# Altium PCB STM32.PcbDoc (part 3 of 6)
Units mm, origin at the board's own origin, x right, y up, seen from the top; angles counter-clockwise.
Board outline 99.69 x 99.7 mm, 2 copper layers (Top Layer, Bottom Layer); 150 components, 142 nets, 668 pads, 273 vias.
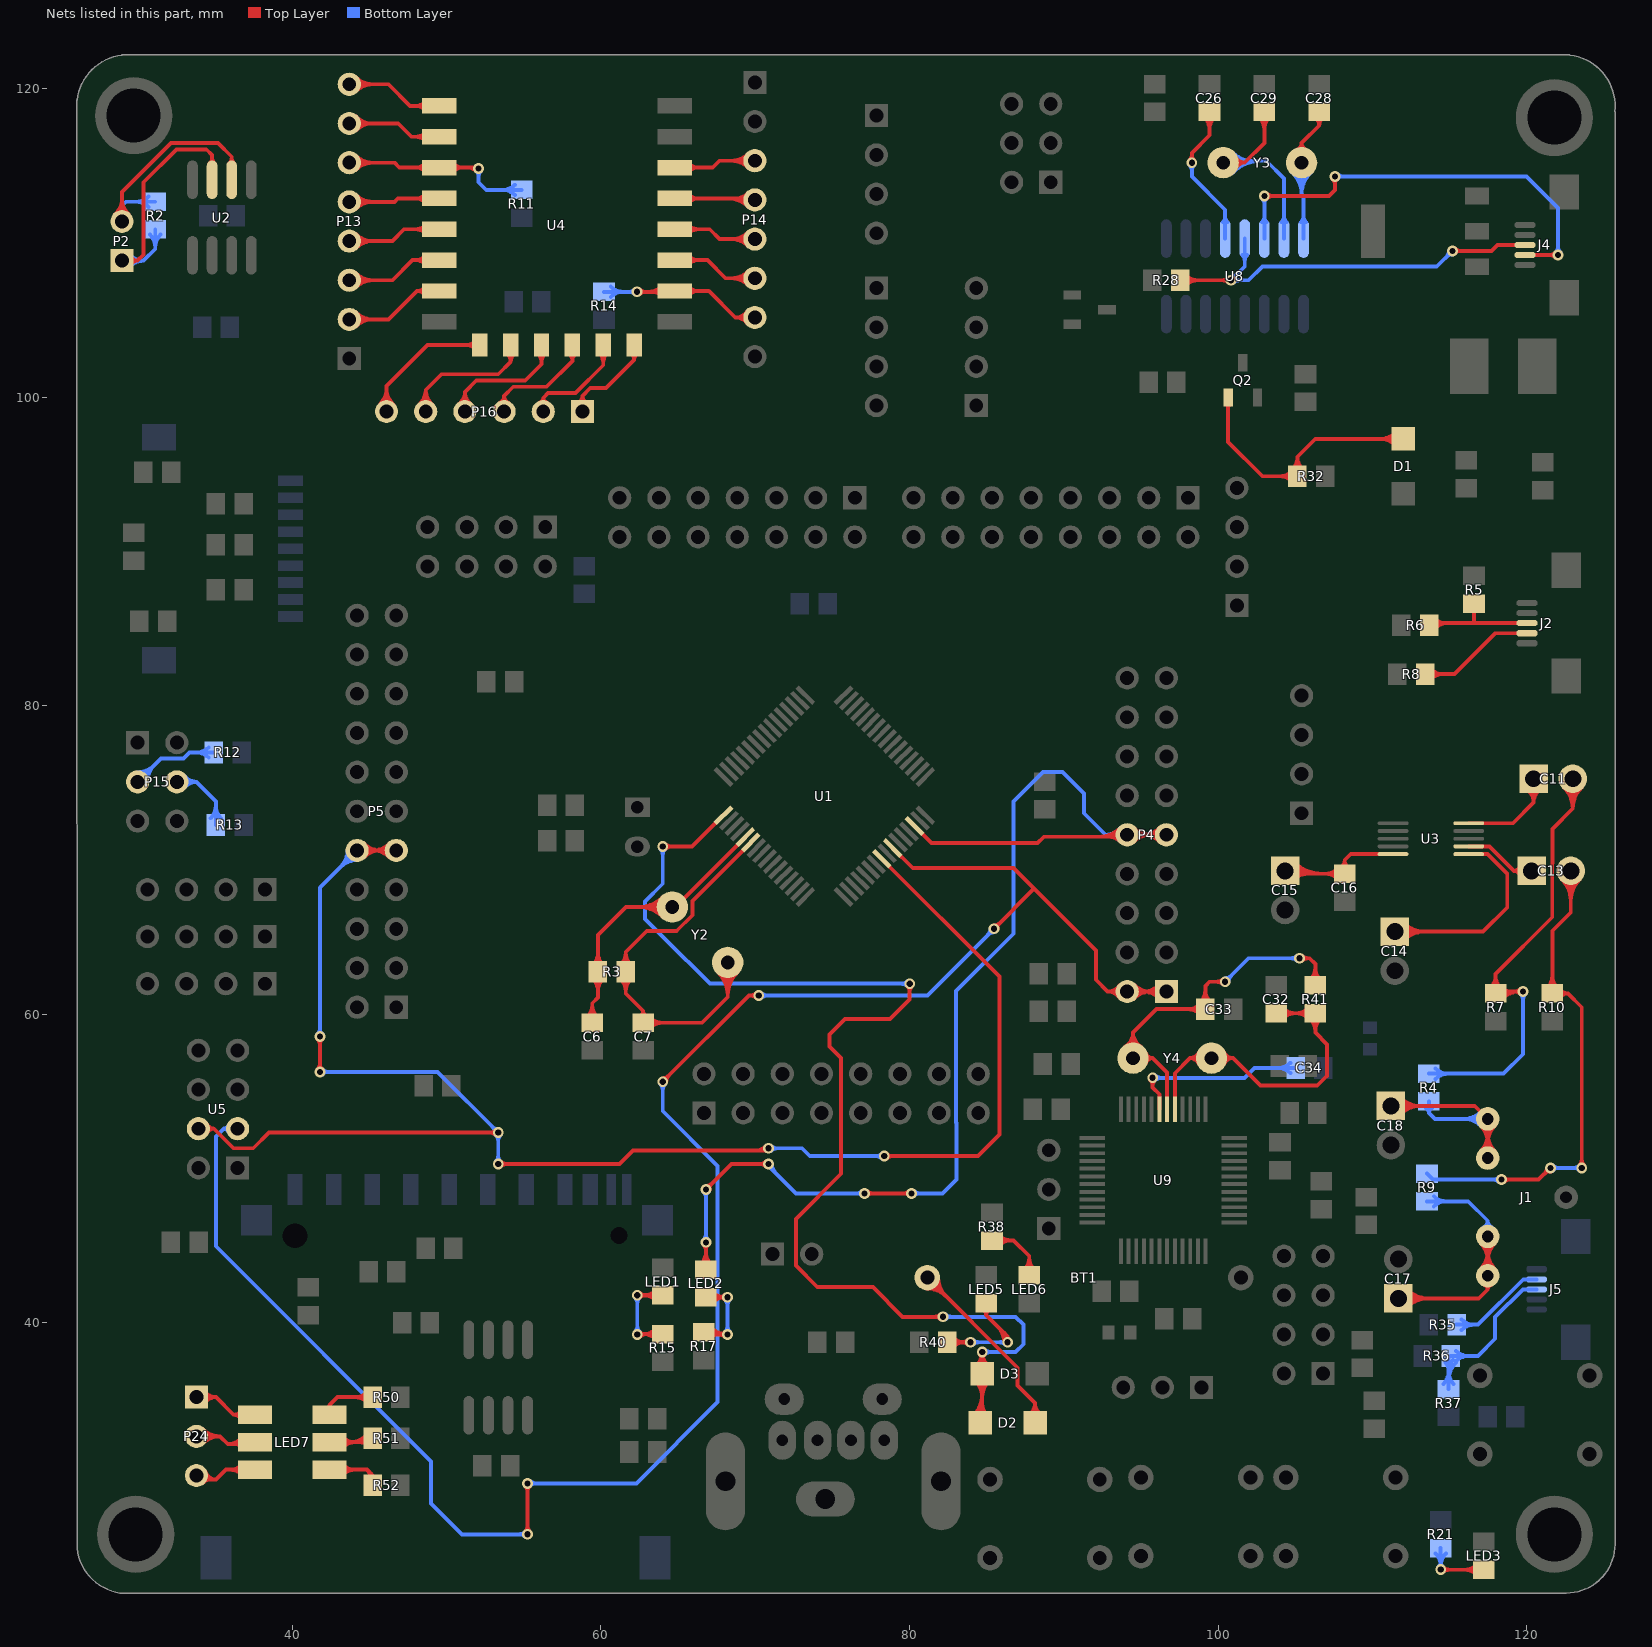
[diagram p3: the nets of this part, all layers, seen from the top]

## Via types
v1: diameter 0.7, hole 0.4, Top Layer to Bottom Layer, 272 vias
v2: diameter 1.27, hole 0.711, Top Layer to Bottom Layer, 1 vias

## Nets (pads, with @x,y where several pads share a name; then routed paths per layer and width w, separated by ;. In a path a pad name is that pad's centre, name@x,y a point inside that pad or via, vN(x,y) a via of type N, cw(c..) or ccw(c..) an arc to the next point about the centre after c; other vN are vias at no path point) (continued)
LED2: LED2.2 P4.9 P4.10 U1.30 | length 101.7
  Top Layer w0.25: LED2.2@66.466,43.781 ccw(c65.655,44.592) 66.802,44.592 ccw(c67.949,44.592) LED2.2@67.138,43.781 ; v1@66.643,45.053 cw(c66.259,44.669) 66.802,44.669 cw(c67.345,44.669) v1@66.961,45.053 ; LED2.2@66.802,43.445 v1(66.802,45.212) ; v1(66.802,48.641) 68.453,50.292 v1(70.866,50.292) ; v1@66.802,48.866 ccw(c66.802,49.409) 67.186,49.025 ccw(c67.57,48.641) v1@67.027,48.641 ; v1@70.707,50.133 ccw(c70.323,49.749) 70.323,50.292 ccw(c70.323,50.835) v1@70.707,50.451 ; v1(77.089,48.387) v1(80.137,48.387) ; v1@77.248,48.228 cw(c77.632,47.844) 77.632,48.387 cw(c77.632,48.93) v1@77.248,48.546 ; v1@79.978,48.228 ccw(c79.594,47.844) 79.594,48.387 ccw(c79.594,48.93) v1@79.978,48.546 ; P4.10@94.107,71.628 P4.9@96.647,71.628 ; P4.10@94.372,71.363 cw(c95.012,70.723) 95.012,71.628 cw(c95.012,72.533) P4.10@94.372,71.893 ; P4.10@94.549,71.186 cw(c95.616,70.119) 95.616,71.628 cw(c95.616,73.137) P4.10@94.549,72.07 ; P4.9@96.205,71.186 ccw(c95.138,70.119) 95.138,71.628 ccw(c95.138,73.137) P4.9@96.205,72.07 ; P4.9@96.382,71.363 ccw(c95.742,70.723) 95.742,71.628 ccw(c95.742,72.533) P4.9@96.382,71.893
  Top Layer w0.254: U1.30@80.319,72.191 81.414,71.097 88.306,71.097 88.71,71.501 93.98,71.501 P4.10@94.107,71.628 ; 92.296,71.501 ccw(c92.296,73.439) P4.10@93.666,72.069 ; P4.10@93.666,71.187 ccw(c92.91,70.431) 92.91,71.501 ccw(c92.91,72.825) P4.10@93.846,71.889
  Bottom Layer w0.25: v1@66.643,45.371 ccw(c66.259,45.755) 66.802,45.755 ccw(c67.345,45.755) v1@66.961,45.371 ; v1@66.643,48.482 cw(c66.259,48.098) 66.802,48.098 cw(c67.345,48.098) v1@66.961,48.482 ; v1(66.802,45.212) v1(66.802,48.641) ; v1(70.866,50.292) 70.739,50.292 72.644,48.387 v1(77.089,48.387) ; v1@71.091,50.292 ccw(c71.941,50.292) 71.34,49.691 ; v1@76.93,48.228 ccw(c76.546,47.844) 76.546,48.387 ccw(c76.546,48.93) v1@76.93,48.546 ; v1(80.137,48.387) 82.146,48.387 83.035,49.276 83.035,52.96 83.021,52.973 83.021,61.495 86.741,65.215 86.741,73.787 88.646,75.692 89.916,75.692 91.313,74.295 91.313,73.025 92.71,71.628 ; v1@80.296,48.228 cw(c80.68,47.844) 80.68,48.387 cw(c80.68,48.93) v1@80.296,48.546 ; P4.10@93.641,71.211 ccw(c92.71,70.379) 92.71,71.628 ; P4.10@93.641,72.045 cw(c92.71,72.877) 92.71,71.628 ; P4.10@93.827,71.378 ccw(c93.269,70.879) 93.269,71.628 ccw(c93.269,72.377) P4.10@93.827,71.878 ; P4.10@94.107,71.628 92.71,71.628
NCE: P4.1 P4.2 U1.26 U5.3 | length 150
  Top Layer w0.25: P4.2@94.107,61.468 P4.1@96.647,61.468 ; P4.2@94.372,61.203 cw(c95.012,60.563) 95.012,61.468 cw(c95.012,62.373) P4.2@94.372,61.733 ; P4.2@94.549,61.026 cw(c95.616,59.959) 95.616,61.468 cw(c95.616,62.977) P4.2@94.549,61.91 ; P4.1@96.205,61.026 ccw(c95.138,59.959) 95.138,61.468 ccw(c95.138,62.977) P4.1@96.205,61.91 ; P4.1@96.382,61.203 ccw(c95.742,60.563) 95.742,61.468 ccw(c95.742,62.373) P4.1@96.382,61.733
  Top Layer w0.254: v1@55.087,26.447 ccw(c54.707,26.827) 55.245,26.827 ccw(c55.783,26.827) v1@55.403,26.447 ; v1@55.087,29.433 cw(c54.707,29.053) 55.245,29.053 cw(c55.783,29.053) v1@55.403,29.433 ; v1(55.245,26.289) v1(55.245,29.591) ; v1(64.008,55.626) 69.596,61.214 v1(70.231,61.214) ; v1@64.008,55.849 ccw(c64.008,56.387) 64.389,56.007 ccw(c64.769,55.626) v1@64.231,55.626 ; v1@70.073,61.056 ccw(c69.693,60.676) 69.693,61.214 ccw(c69.693,61.752) v1@70.073,61.372 ; U1.26@78.905,70.777 80.207,69.475 86.735,69.475 88.107,68.103 ; v1(85.471,65.532) 88.042,68.103 88.107,68.103 ; v1@85.471,65.755 ccw(c85.471,66.293) 85.852,65.913 ccw(c86.232,65.532) v1@85.694,65.532 ; P4.2@93.614,61.087 ccw(c92.837,60.485) 92.837,61.468 ; P4.2@93.614,61.849 cw(c92.837,62.451) 92.837,61.468 ; P4.2@93.815,61.242 ccw(c93.355,60.886) 93.355,61.468 ccw(c93.355,62.05) P4.2@93.815,61.694 ; P4.2@94.107,61.468 92.837,61.468 ; 88.107,68.103 92.075,64.135 92.075,62.23 92.837,61.468
  Bottom Layer w0.254: U5.3@35.863,52.365 ccw(c35.56,52.255) 35.56,52.578 ; U5.3@35.863,52.791 cw(c35.56,52.901) 35.56,52.578 ; U5.3@36.449,52.578 35.56,52.578 ; v1@55.087,26.131 ccw(c54.707,25.751) 54.707,26.289 ccw(c54.707,26.827) v1@55.087,26.447 ; v1(55.245,26.289) 50.987,26.289 48.997,28.28 48.997,31.013 35.052,44.958 35.052,52.07 35.56,52.578 ; v1(55.245,29.591) 62.293,29.591 67.564,34.862 67.564,50.165 64.008,53.721 v1(64.008,55.626) ; v1@55.403,29.433 cw(c55.783,29.053) 55.783,29.591 cw(c55.783,30.129) v1@55.403,29.749 ; v1@63.85,55.468 cw(c63.47,55.088) 64.008,55.088 cw(c64.546,55.088) v1@64.166,55.468 ; v1(70.231,61.214) 81.153,61.214 v1(85.471,65.532) ; v1@70.389,61.056 cw(c70.769,60.676) 70.769,61.214 cw(c70.769,61.752) v1@70.389,61.372 ; v1@85.248,65.532 cw(c84.71,65.532) 85.09,65.151 cw(c85.471,64.771) v1@85.471,65.309
NCS: P5.9 P5.10 U1.24 U5.4 | length 131.8
  Top Layer w0.25: U5.4@33.909,52.578 34.925,52.578 ; U5.4@34.467,52.296 cw(c34.925,52.065) 34.925,52.578 ; U5.4@34.467,52.86 ccw(c34.925,53.091) 34.925,52.578 ; v1@41.624,56.42 ccw(c41.24,56.804) 41.783,56.804 ccw(c42.326,56.804) v1@41.942,56.42 ; v1@41.624,58.388 cw(c41.24,58.004) 41.783,58.004 cw(c42.326,58.004) v1@41.942,58.388 ; v1(41.783,56.261) v1(41.783,58.547) ; P5.10@44.196,70.612 P5.9@46.736,70.612 ; P5.10@44.461,70.347 cw(c45.101,69.707) 45.101,70.612 cw(c45.101,71.517) P5.10@44.461,70.877 ; P5.10@44.638,70.17 cw(c45.705,69.103) 45.705,70.612 cw(c45.705,72.121) P5.10@44.638,71.054 ; P5.9@46.294,70.17 ccw(c45.227,69.103) 45.227,70.612 ccw(c45.227,72.121) P5.9@46.294,71.054 ; P5.9@46.471,70.347 ccw(c45.831,69.707) 45.831,70.612 ccw(c45.831,71.517) P5.9@46.471,70.877 ; v1@53.181,52.165 ccw(c52.797,51.781) 52.797,52.324 ccw(c52.797,52.867) v1@53.181,52.483 ; v1(53.34,50.292) 61.214,50.292 62.082,51.16 70.718,51.16 v1(70.866,51.308) ; v1(53.34,52.324) 38.481,52.324 37.465,51.308 36.195,51.308 34.925,52.578 ; v1@53.499,50.133 cw(c53.883,49.749) 53.883,50.292 cw(c53.883,50.835) v1@53.499,50.451 ; 69.965,51.16 ccw(c69.965,52.209) v1@70.707,51.467 ; U1.24@78.198,70.07 85.831,62.437 85.831,52.197 84.434,50.8 v1(78.359,50.8) ; v1@78.518,50.641 cw(c78.902,50.257) 78.902,50.8 cw(c78.902,51.343) v1@78.518,50.959
  Bottom Layer w0.25: v1@41.624,58.706 ccw(c41.24,59.09) 41.783,59.09 ccw(c42.326,59.09) v1@41.942,58.706 ; v1(41.783,56.261) 49.403,56.261 v1(53.34,52.324) v1(53.34,50.292) ; v1(41.783,58.547) 41.783,68.199 P5.10@44.196,70.612 ; v1@41.942,56.102 cw(c42.326,55.718) 42.326,56.261 cw(c42.326,56.804) v1@41.942,56.42 ; P5.10@43.571,70.612 cw(c42.062,70.612) 43.129,69.545 cw(c44.196,68.478) P5.10@44.196,69.987 ; P5.10@43.821,70.612 cw(c42.916,70.612) 43.556,69.972 cw(c44.196,69.332) P5.10@44.196,70.237 ; v1@53.115,52.324 ccw(c52.572,52.324) 52.956,52.708 ccw(c53.34,53.092) v1@53.34,52.549 ; v1@53.181,50.451 ccw(c52.797,50.835) 53.34,50.835 ccw(c53.883,50.835) v1@53.499,50.451 ; v1@53.181,52.165 cw(c52.797,51.781) 53.34,51.781 cw(c53.883,51.781) v1@53.499,52.165 ; v1(70.866,51.308) 73.025,51.308 73.533,50.8 v1(78.359,50.8) ; v1@71.025,51.149 cw(c71.409,50.765) 71.409,51.308 cw(c71.409,51.851) v1@71.025,51.467 ; v1@78.2,50.641 ccw(c77.816,50.257) 77.816,50.8 ccw(c77.816,51.343) v1@78.2,50.959
NetBT1_1: BT1.1 D2.1 | length 18.4
  Top Layer w0.254: BT1.1@81.153,42.227 cw(c81.153,40.539) 82.347,41.732 cw(c83.54,42.926) BT1.1@81.852,42.926 ; BT1.1@81.153,42.481 cw(c81.153,41.406) 81.913,42.166 cw(c82.673,42.926) BT1.1@81.598,42.926 ; BT1.1@81.153,42.926 86.995,37.084 86.995,35.941 88.138,34.798 ; D2.1@87.757,34.036 ccw(c87.186,34.798) 88.138,34.798 ; D2.1@88.138,33.528 88.138,34.798 ; D2.1@88.519,34.036 cw(c89.09,34.798) 88.138,34.798
NetC6_2: C6.2 R3.1 U1.5 Y2.1 | length 29
  Top Layer w0.25: C6.2@59.1,59.783 ccw(c58.289,60.594) 59.436,60.594 ccw(c60.583,60.594) C6.2@59.772,59.783 ; C6.2@59.436,59.447 59.436,60.706 59.806,61.076 R3.1@59.806,62.738 59.806,65.14 61.613,66.947 Y2.1@64.625,66.947 ; R3.1@59.47,62.302 cw(c58.659,61.491) 59.806,61.491 cw(c60.953,61.491) R3.1@60.142,62.302 ; R3.1@59.47,63.174 ccw(c58.659,63.985) 59.806,63.985 ccw(c60.953,63.985) R3.1@60.142,63.174 ; Y2.1@63.995,66.317 ccw(c62.474,64.796) 62.474,66.947 ccw(c62.474,69.098) Y2.1@63.995,67.577 ; Y2.1@64.172,66.494 ccw(c63.077,65.4) 63.077,66.947 ccw(c63.077,68.495) Y2.1@64.172,67.4
  Top Layer w0.254: Y2.1@64.822,66.947 U1.5@69.359,71.484
NetC7_2: C7.2 R3.2 U1.6 Y2.2 | length 37.1
  Top Layer w0.25: R3.2@61.27,62.302 cw(c60.459,61.491) 61.606,61.491 cw(c62.753,61.491) R3.2@61.942,62.302 ; R3.2@61.606,62.738 61.606,61.33 62.738,60.198 ; C7.2@62.534,59.876 ccw(c62.382,60.198) 62.738,60.198 ; C7.2@62.942,59.876 cw(c63.094,60.198) 62.738,60.198 ; C7.2@63.174,59.111 cw(c63.985,58.3) 63.985,59.447 cw(c63.985,60.594) C7.2@63.174,59.783 ; Y2.2@67.587,62.725 cw(c66.066,61.204) 68.217,61.204 cw(c70.368,61.204) Y2.2@68.847,62.725 ; Y2.2@67.764,62.902 cw(c66.67,61.807) 68.217,61.807 cw(c69.765,61.807) Y2.2@68.67,62.902 ; Y2.2@68.217,63.355 68.217,61.105 66.559,59.447 C7.2@62.738,59.447 62.738,60.198
  Top Layer w0.254: R3.2@61.272,63.173 ccw(c60.464,63.98) 61.606,63.98 ccw(c62.748,63.98) R3.2@61.94,63.173 ; R3.2@61.606,62.738 61.606,64.019 62.992,65.405 64.915,65.405 65.92,66.41 65.92,67.338 U1.6@69.713,71.13
NetC11_1: C11.1 U3.10 | length 9.8
  Top Layer w0.25: U3.10@116.242,72.374 119.11,72.374 120.447,73.711 ; C11.1@119.984,74.608 cw(c119.347,73.711) 120.447,73.711 ; C11.1@120.128,74.812 cw(c119.69,74.195) 120.447,74.195 cw(c121.203,74.195) C11.1@120.765,74.812 ; C11.1@120.447,75.26 120.447,73.711 ; C11.1@120.91,74.608 ccw(c121.547,73.711) 120.447,73.711
NetC11_2: C11.2 R4.2 R7.2 | length 41.5
  Top Layer w0.25: R7.2@117.647,61.688 ccw(c116.836,62.499) 117.983,62.499 ccw(c119.13,62.499) R7.2@118.319,61.688 ; R7.2@118.242,61.193 cw(c118.906,60.529) 118.906,61.468 ; R7.2@118.419,61.016 cw(c119.51,59.925) v1@119.51,61.468 ; R7.2@118.419,61.688 ccw(c118.95,62.219) 118.95,61.468 ; v1@119.602,61.309 ccw(c119.218,60.925) 119.218,61.468 ccw(c119.218,62.011) v1@119.602,61.627 ; v1(119.761,61.468) 118.099,61.468 R7.2@117.983,61.352 117.983,62.611 121.657,66.285 121.657,69.798 121.666,69.806 121.666,72.009 122.987,73.33 ; C11.2@122.421,74.694 cw(c121.058,73.33) 122.987,73.33 ; C11.2@122.598,74.871 cw(c121.661,73.933) 122.987,73.933 cw(c124.313,73.933) C11.2@123.376,74.871 ; C11.2@122.987,75.26 122.987,73.33 ; C11.2@123.552,74.694 ccw(c124.916,73.33) 122.987,73.33
  Bottom Layer w0.25: R4.2@113.665,56.145 118.502,56.145 119.761,57.404 v1(119.761,61.468) ; R4.2@114.101,55.809 cw(c114.912,54.998) 114.912,56.145 cw(c114.912,57.292) R4.2@114.101,56.481 ; v1@119.602,61.309 cw(c119.218,60.925) 119.761,60.925 cw(c120.304,60.925) v1@119.92,61.309
NetC13_1: C13.1 U3.7 | length 5.8
  Top Layer w0.25: U3.7@116.242,70.874 117.594,70.874 119.177,69.291 ; C13.1@119.568,69.017 ccw(c119.177,68.875) 119.177,69.291 ; C13.1@119.568,69.565 cw(c119.177,69.708) 119.177,69.291 ; C13.1@120.32,69.291 119.177,69.291
NetC13_2: C13.2 R9.1 R10.2 | length 44.9
  Top Layer w0.25: v1(118.364,49.276) 120.777,49.276 v1(121.539,50.038) ; v1@118.523,49.117 cw(c118.907,48.733) 118.907,49.276 cw(c118.907,49.819) v1@118.523,49.435 ; v1@121.314,50.038 cw(c120.771,50.038) 121.155,49.654 cw(c121.539,49.27) v1@121.539,49.813 ; R10.2@121.33,61.688 ccw(c120.519,62.499) 121.666,62.499 ccw(c122.813,62.499) R10.2@122.002,61.688 ; R10.2@122.157,61.082 cw(c122.671,60.728) 122.671,61.352 ; R10.2@122.157,61.622 ccw(c122.671,61.977) 122.671,61.352 ; C13.2@122.294,68.726 cw(c120.928,67.36) 122.86,67.36 cw(c124.791,67.36) C13.2@123.425,68.726 ; C13.2@122.471,68.902 cw(c121.532,67.963) 122.86,67.963 cw(c124.188,67.963) C13.2@123.249,68.902 ; C13.2@122.86,69.291 122.86,66.599 121.666,65.405 R10.2@121.666,61.352 122.671,61.352 ; v1@123.412,50.197 ccw(c123.028,50.581) 123.571,50.581 ccw(c124.114,50.581) v1@123.73,50.197 ; v1(123.571,50.038) 123.571,60.452 122.671,61.352
  Bottom Layer w0.25: R9.1@113.538,49.668 113.93,49.276 v1(118.364,49.276) ; v1@118.205,49.117 ccw(c117.821,48.733) 117.821,49.276 ccw(c117.821,49.819) v1@118.205,49.435 ; v1(121.539,50.038) v1(123.571,50.038) ; v1@121.698,49.879 cw(c122.082,49.495) 122.082,50.038 cw(c122.082,50.581) v1@121.698,50.197 ; v1@123.412,49.879 ccw(c123.028,49.495) 123.028,50.038 ccw(c123.028,50.581) v1@123.412,50.197
NetC14_1: C14.1 U3.6 | length 18.3
  Top Layer w0.25: C14.1@111.455,65.354 117.17,65.354 118.745,66.929 118.745,69.088 117.459,70.374 U3.6@116.242,70.374 ; C14.1@111.844,64.965 cw(c112.783,64.026) 112.783,65.354 cw(c112.783,66.682) C14.1@111.844,65.743 ; C14.1@112.021,64.789 cw(c113.387,63.423) 113.387,65.354 cw(c113.387,67.286) C14.1@112.021,65.92
NetC15_1: C15.1 C16.1 U3.5 | length 16.5
  Top Layer w0.25: C15.1@104.535,69.099 C16.1@108.204,69.099 108.204,69.977 ; C15.1@104.555,69.503 ccw(c105.532,70.48) 105.532,69.099 ; C15.1@104.732,69.68 ccw(c106.135,71.083) 106.135,69.099 ; C15.1@104.909,68.726 cw(c105.81,67.824) 105.81,69.099 ; C15.1@104.909,69.857 ccw(c106.739,71.687) 106.739,69.099 ; C16.1@107.768,68.763 ccw(c106.957,67.952) 106.957,69.099 ccw(c106.957,70.246) C16.1@107.768,69.435 ; C16.1@107.944,69.497 ccw(c107.63,69.977) 108.204,69.977 ; C16.1@108.464,69.497 cw(c108.778,69.977) 108.204,69.977 ; U3.5@111.342,70.374 108.601,70.374 108.204,69.977
NetC17_1: C17.1 J1.2 R9.2 | length 31.5
  Top Layer w0.25: C17.1@111.684,41.58 116.891,41.58 117.475,42.164 ; C17.1@112.073,41.191 cw(c113.012,40.252) 113.012,41.58 cw(c113.012,42.908) C17.1@112.073,41.969 ; C17.1@112.249,41.014 cw(c113.615,39.648) 113.615,41.58 cw(c113.615,43.511) C17.1@112.249,42.145 ; J1.2@117.025,43.503 ccw(c115.937,44.591) 117.475,44.591 ccw(c119.013,44.591) J1.2@117.925,43.503 ; J1.2@117.025,45.143 cw(c115.937,44.055) 117.475,44.055 cw(c119.013,44.055) J1.2@117.925,45.143 ; J1.2@117.201,43.327 ccw(c116.541,43.987) 117.475,43.987 ccw(c118.409,43.987) J1.2@117.749,43.327 ; J1.2@117.201,45.319 cw(c116.541,44.659) 117.475,44.659 cw(c118.409,44.659) J1.2@117.749,45.319 ; J1.2@117.27,42.45 cw(c117.173,42.164) 117.475,42.164 ; J1.2@117.475,45.593 J1.2@117.475,43.053 117.475,42.164 ; J1.2@117.68,42.45 ccw(c117.777,42.164) 117.475,42.164
  Bottom Layer w0.25: R9.2@113.538,47.868 116.216,47.868 117.475,46.609 ; R9.2@113.974,47.532 cw(c114.785,46.721) 114.785,47.868 cw(c114.785,49.015) R9.2@113.974,48.204 ; J1.2@117.198,46.166 ccw(c116.983,46.609) 117.475,46.609 ; J1.2@117.475,45.593 117.475,46.609 ; J1.2@117.752,46.166 cw(c117.967,46.609) 117.475,46.609
NetC18_1: C18.1 J1.3 R4.1 | length 31.5
  Top Layer w0.25: C18.1@111.201,54.051 116.637,54.051 J1.3@117.475,53.213 J1.3@117.475,50.673 ; C18.1@111.59,53.662 cw(c112.529,52.723) 112.529,54.051 cw(c112.529,55.379) C18.1@111.59,54.44 ; C18.1@111.767,53.486 cw(c113.133,52.12) 113.133,54.051 cw(c113.133,55.983) C18.1@111.767,54.617 ; J1.3@117.025,51.123 ccw(c115.937,52.211) 117.475,52.211 ccw(c119.013,52.211) J1.3@117.925,51.123 ; J1.3@117.025,52.763 cw(c115.937,51.675) 117.475,51.675 cw(c119.013,51.675) J1.3@117.925,52.763 ; J1.3@117.201,50.947 ccw(c116.541,51.607) 117.475,51.607 ccw(c118.409,51.607) J1.3@117.749,50.947 ; J1.3@117.201,52.939 cw(c116.541,52.279) 117.475,52.279 cw(c118.409,52.279) J1.3@117.749,52.939
  Bottom Layer w0.25: R4.1@113.461,53.916 cw(c113.309,53.594) 113.665,53.594 ; R4.1@113.665,54.345 113.665,53.594 ; R4.1@113.869,53.916 ccw(c114.021,53.594) 113.665,53.594 ; J1.3@117.025,52.763 ccw(c115.937,51.675) 115.937,53.213 ccw(c115.937,54.751) J1.3@117.025,53.663 ; J1.3@117.201,52.939 ccw(c116.541,52.279) 116.541,53.213 ccw(c116.541,54.147) J1.3@117.201,53.487 ; J1.3@117.475,53.213 114.046,53.213 113.665,53.594
NetC26_1: C26.1 U8.4 | length 13.9
  Top Layer w0.25: v1@98.139,115.348 ccw(c97.755,115.732) 98.298,115.732 ccw(c98.841,115.732) v1@98.457,115.348 ; v1(98.298,115.189) 98.298,115.824 99.441,116.967 C26.1@99.441,118.48 ; C26.1@99.105,118.144 cw(c98.294,117.333) 99.441,117.333 cw(c100.588,117.333) C26.1@99.777,118.144
  Bottom Layer w0.25: v1@98.139,115.03 cw(c97.755,114.646) 98.298,114.646 cw(c98.841,114.646) v1@98.457,115.03 ; v1(98.298,115.189) 98.298,114.3 100.457,112.141 U8.4@100.457,110.273 ; U8.4@100.298,111.332 ccw(c99.914,111.716) 100.457,111.716 ccw(c101,111.716) U8.4@100.616,111.332
NetC28_2: C28.2 U8.8 Y3.1 | length 17.2
  Top Layer w0.25: Y3.1@105.107,116.027 ccw(c104.95,116.459) 105.41,116.459 ; Y3.1@105.41,115.189 105.41,116.459 ; Y3.1@105.713,116.027 cw(c105.87,116.459) 105.41,116.459 ; C28.2@106.293,118.082 cw(c105.979,117.602) 106.553,117.602 ; C28.2@106.553,118.48 106.553,117.602 ; C28.2@106.813,118.082 ccw(c107.127,117.602) 106.553,117.602 ; 105.41,116.459 106.553,117.602
  Bottom Layer w0.25: Y3.1@104.806,114.534 cw(c103.539,113.157) 105.41,113.157 ; Y3.1@104.976,114.717 cw(c104.064,113.727) 105.41,113.727 cw(c106.756,113.727) Y3.1@105.844,114.717 ; U8.8@105.378,111.332 ccw(c104.994,111.716) 105.537,111.716 ccw(c106.08,111.716) U8.8@105.696,111.332 ; Y3.1@105.41,115.189 105.41,113.157 ; U8.8@105.537,110.273 105.537,113.03 105.41,113.157 ; Y3.1@106.014,114.534 ccw(c107.281,113.157) 105.41,113.157
NetC29_2: C29.2 U8.7 Y3.2 | length 24.6
  Top Layer w0.25: Y3.2@100.33,115.189 101.727,115.189 ; Y3.2@101.138,114.813 cw(c101.727,114.539) 101.727,115.189 ; Y3.2@101.138,115.565 ccw(c101.727,115.839) 101.727,115.189 ; C29.2@102.661,118.144 cw(c101.85,117.333) 102.997,117.333 cw(c104.144,117.333) C29.2@103.333,118.144 ; C29.2@102.997,118.48 102.997,116.459 101.727,115.189
  Bottom Layer w0.25: Y3.2@100.33,115.189 100.457,115.316 103.124,115.316 104.267,114.173 U8.7@104.267,110.273 ; Y3.2@100.606,114.913 cw(c101.581,113.938) 101.581,115.316 ; Y3.2@100.783,114.736 cw(c102.184,113.335) 102.184,115.316 ; Y3.2@100.783,115.642 ccw(c101.571,116.43) 101.571,115.316 ; Y3.2@100.96,114.559 cw(c102.788,112.731) 102.788,115.316 ; Y3.2@100.96,115.819 ccw(c102.174,117.033) 102.174,115.316 ; U8.7@104.108,111.332 ccw(c103.724,111.716) 104.267,111.716 ccw(c104.81,111.716) U8.7@104.426,111.332
NetC32_2: C32.2 R41.1 U9.5 Y4.1 | length 28.9
  Top Layer w0.254: U9.5@97.194,53.837 97.194,56.173 98.171,57.15 ; Y4.1@98.763,56.774 ccw(c98.171,56.497) 98.171,57.15 ; Y4.1@98.763,57.526 cw(c98.171,57.803) 98.171,57.15 ; Y4.1@100.373,56.774 cw(c100.965,56.497) 100.965,57.15 ; Y4.1@100.373,57.526 ccw(c100.965,57.803) 100.965,57.15 ; C32.2@103.759,60.06 R41.1@106.299,60.06 106.299,58.801 107.061,58.039 107.061,56.007 106.426,55.372 102.743,55.372 100.965,57.15 ; C32.2@104.193,59.726 cw(c105.001,58.918) 105.001,60.06 cw(c105.001,61.202) C32.2@104.193,60.394 ; R41.1@105.865,59.726 ccw(c105.057,58.918) 105.057,60.06 ccw(c105.057,61.202) R41.1@105.865,60.394 ; R41.1@105.965,59.726 cw(c105.157,58.918) 106.299,58.918 cw(c107.441,58.918) R41.1@106.633,59.726 ; 98.171,57.15 Y4.1@99.568,57.15 100.965,57.15
NetC33_2: C33.2 R41.2 U9.6 Y4.2 | length 36.4
  Top Layer w0.254: Y4.2@93.999,57.892 ccw(c93.4,58.801) 94.488,58.801 ; Y4.2@94.138,57.68 ccw(c93.711,58.329) 94.488,58.329 ccw(c95.265,58.329) Y4.2@94.838,57.68 ; Y4.2@94.977,57.892 cw(c95.576,58.801) 94.488,58.801 ; Y4.2@95.323,56.846 cw(c95.758,56.687) 95.758,57.15 ; Y4.2@95.323,57.454 ccw(c95.758,57.613) 95.758,57.15 ; U9.6@96.694,53.837 96.694,56.214 95.758,57.15 ; C33.2@98.842,59.991 ccw(c98.034,59.183) 98.034,60.325 ccw(c98.034,61.467) C33.2@98.842,60.659 ; C33.2@98.842,60.759 ccw(c98.034,61.567) 99.176,61.567 ccw(c100.318,61.567) C33.2@99.51,60.759 ; v1@100.299,61.945 ccw(c99.919,61.565) 99.919,62.103 ccw(c99.919,62.641) v1@100.299,62.261 ; v1(100.457,62.103) 99.441,62.103 99.176,61.838 C33.2@99.176,60.325 96.012,60.325 94.488,58.801 ; v1(105.283,63.627) 105.918,63.627 106.299,63.246 R41.2@106.299,61.86 ; v1@105.441,63.469 cw(c105.821,63.089) 105.821,63.627 cw(c105.821,64.165) v1@105.441,63.785 ; R41.2@105.965,62.194 ccw(c105.157,63.002) 106.299,63.002 ccw(c107.441,63.002) R41.2@106.633,62.194 ; 94.488,58.801 Y4.2@94.488,57.15 95.758,57.15
  Bottom Layer w0.254: v1(100.457,62.103) 101.981,63.627 v1(105.283,63.627) ; v1@100.457,62.326 ccw(c100.457,62.864) 100.838,62.484 ccw(c101.218,62.103) v1@100.68,62.103 ; v1@105.125,63.469 ccw(c104.745,63.089) 104.745,63.627 ccw(c104.745,64.165) v1@105.125,63.785
NetC34_2: C34.2 U9.7 | length 15.3
  Top Layer w0.254: v1@95.6,55.722 cw(c95.22,55.342) 95.758,55.342 cw(c96.296,55.342) v1@95.916,55.722 ; v1(95.758,55.88) 95.758,55.245 96.194,54.809 U9.7@96.194,53.837
  Bottom Layer w0.254: v1(95.758,55.88) 95.783,55.855 101.702,55.855 102.362,56.515 C34.2@105.018,56.515 ; v1@95.916,55.722 cw(c96.235,55.403) 96.235,55.855 ; v1@95.916,56.038 ccw(c96.358,56.48) 96.358,55.855 ; C34.2@104.684,56.181 ccw(c103.876,55.373) 103.876,56.515 ccw(c103.876,57.657) C34.2@104.684,56.849
NetD1_2: D1.2 Q2.1 R32.2 | length 25
  Top Layer w0.25: Q2.1@100.526,99.568 cw(c100.228,99.269) 100.65,99.269 cw(c101.072,99.269) Q2.1@100.774,99.568 ; Q2.1@100.65,99.967 100.65,97.089 102.87,94.869 R32.2@105.145,94.869 105.145,96.128 106.299,97.282 D1.2@112.014,97.282 ; R32.2@104.809,94.533 ccw(c103.998,93.722) 103.998,94.869 ccw(c103.998,96.016) R32.2@104.809,95.205 ; R32.2@104.809,95.305 ccw(c103.998,96.116) 105.145,96.116 ccw(c106.292,96.116) R32.2@105.481,95.305 ; D1.2@111.564,96.832 ccw(c110.476,95.744) 110.476,97.282 ccw(c110.476,98.82) D1.2@111.564,97.732 ; D1.2@111.74,97.008 ccw(c111.08,96.348) 111.08,97.282 ccw(c111.08,98.216) D1.2@111.74,97.556
NetD2_2: D2.2 D3.2 U1.1 | length 95
  Top Layer w0.254: v1(64.008,70.866) 65.913,70.866 U1.1@67.945,72.898 ; v1@64.166,70.708 cw(c64.546,70.328) 64.546,70.866 cw(c64.546,71.404) v1@64.166,71.024 ; 74.936,58.807 74.803,58.674 74.803,57.912 75.565,57.15 75.565,49.657 72.631,46.723 72.631,43.701 74.018,42.314 77.627,42.314 79.555,40.386 v1(82.169,40.386) ; 74.936,58.808 75.818,59.69 78.74,59.69 80.01,60.96 v1(80.01,61.976) ; v1@79.852,61.818 cw(c79.472,61.438) 80.01,61.438 cw(c80.548,61.438) v1@80.168,61.818 ; v1@82.011,40.228 ccw(c81.631,39.848) 81.631,40.386 ccw(c81.631,40.924) v1@82.011,40.544 ; D2.2@84.133,33.977 ccw(c82.742,35.368) 84.709,35.368 ; D3.2@84.26,36.254 cw(c83.176,35.17) 84.709,35.17 cw(c86.242,35.17) D3.2@85.158,36.254 ; D3.2@84.291,37.181 ccw(c83.49,38.1) v1(84.709,38.1) ; D2.2@84.313,33.797 ccw(c83.356,34.754) 84.709,34.754 ccw(c85.808,34.754) D2.2@85.031,33.977 ; D3.2@84.44,36.434 cw(c83.789,35.783) 84.709,35.783 cw(c85.629,35.783) D3.2@84.978,36.434 ; D3.2@84.458,36.99 ccw(c83.978,37.541) 84.709,37.541 ccw(c85.44,37.541) D3.2@84.96,36.99 ; v1@84.551,37.942 cw(c84.171,37.562) 84.709,37.562 cw(c85.247,37.562) v1@84.867,37.942 ; D2.2@84.582,33.528 84.709,33.655 D3.2@84.709,36.703 v1(84.709,38.1) ; D3.2@85.127,37.181 cw(c85.928,38.1) v1(84.709,38.1)
  Bottom Layer w0.254: v1@63.85,70.708 cw(c63.47,70.328) 64.008,70.328 cw(c64.546,70.328) v1@64.166,70.708 ; v1(64.008,70.866) 64.008,68.453 62.865,67.31 62.865,66.168 64.129,64.904 ; 64.129,64.903 67.056,61.976 v1(80.01,61.976) ; v1@79.852,61.818 ccw(c79.472,61.438) 79.472,61.976 ccw(c79.472,62.514) v1@79.852,62.134 ; v1(82.169,40.386) 86.868,40.386 87.376,39.878 87.376,38.608 86.868,38.1 v1(84.709,38.1) ; v1@82.327,40.228 cw(c82.707,39.848) 82.707,40.386 cw(c82.707,40.924) v1@82.327,40.544 ; v1@84.867,37.942 cw(c85.247,37.562) 85.247,38.1 cw(c85.247,38.638) v1@84.867,38.258
NetJ2_2: J2.2 R8.2 | length 9.5
  Top Layer w0.25: R8.2@113.422,82.042 115.316,82.042 117.968,84.694 J2.2@120.015,84.694 ; R8.2@113.758,81.706 cw(c114.569,80.895) 114.569,82.042 cw(c114.569,83.189) R8.2@113.758,82.378
NetJ2_3: J2.3 R5.2 R6.2 | length 9.8
  Top Layer w0.25: R6.2@113.803,85.344 J2.3@120.015,85.344 ; R6.2@113.835,85.158 cw(c114.284,84.709) 114.284,85.344 ; R6.2@114.012,84.981 cw(c114.888,84.105) 114.888,85.344 ; R6.2@114.012,85.653 ccw(c114.758,86.399) 114.758,85.344 ; 116.586,85.344 R5.2@116.586,86.603
NetJ4_2: J4.2 U8.6 | length 34.9
  Top Layer w0.25: v1(102.997,113.03) 107.188,113.03 107.569,113.411 v1(107.569,114.3) ; v1@103.156,112.871 cw(c103.54,112.487) 103.54,113.03 cw(c103.54,113.573) v1@103.156,113.189 ; v1@107.41,114.141 cw(c107.026,113.757) 107.569,113.757 cw(c108.112,113.757) v1@107.728,114.141 ; J4.2@119.888,109.205 v1(122.032,109.205) ; v1@121.873,109.046 ccw(c121.489,108.662) 121.489,109.205 ccw(c121.489,109.748) v1@121.873,109.364
  Bottom Layer w0.25: U8.6@102.838,111.332 ccw(c102.454,111.716) 102.997,111.716 ccw(c103.54,111.716) U8.6@103.156,111.332 ; v1@102.838,112.871 cw(c102.454,112.487) 102.997,112.487 cw(c103.54,112.487) v1@103.156,112.871 ; U8.6@102.997,110.273 v1(102.997,113.03) ; v1(107.569,114.3) 119.985,114.3 122.032,112.253 v1(122.032,109.205) ; v1@107.728,114.141 cw(c108.112,113.757) 108.112,114.3 cw(c108.112,114.843) v1@107.728,114.459 ; v1@121.873,109.364 ccw(c121.489,109.748) 122.032,109.748 ccw(c122.575,109.748) v1@122.191,109.364
NetJ4_3: J4.3 R28.1 U8.5 | length 33.8
  Top Layer w0.25: R28.1@97.547,107.569 v1(100.838,107.569) ; R28.1@97.883,107.233 cw(c98.694,106.422) 98.694,107.569 cw(c98.694,108.716) R28.1@97.883,107.905 ; v1@100.679,107.41 ccw(c100.295,107.026) 100.295,107.569 ccw(c100.295,108.112) v1@100.679,107.728 ; v1(115.189,109.474) 117.729,109.474 118.11,109.855 J4.3@119.888,109.855 ; v1@115.348,109.315 cw(c115.732,108.931) 115.732,109.474 cw(c115.732,110.017) v1@115.348,109.633
  Bottom Layer w0.25: v1@100.838,107.794 ccw(c100.838,108.337) 101.222,107.953 ccw(c101.606,107.569) v1@101.063,107.569 ; v1@100.997,107.41 cw(c101.381,107.026) 101.381,107.569 cw(c101.381,108.112) v1@100.997,107.728 ; 101.219,107.95 v1(100.838,107.569) ; U8.5@101.568,109.214 cw(c101.184,108.83) 101.727,108.83 cw(c102.27,108.83) U8.5@101.886,109.214 ; U8.5@101.727,110.273 101.727,108.458 v1(100.838,107.569) ; v1@114.964,109.474 cw(c114.421,109.474) 114.805,109.09 cw(c115.189,108.706) v1@115.189,109.249 ; v1(115.189,109.474) 114.173,108.458 102.87,108.458 101.981,107.569 v1(100.838,107.569)
NetJ5_2: J5.2 R35.1 | length 8.2
  Bottom Layer w0.254: R35.1@115.454,39.878 116.84,39.878 119.776,42.814 J5.2@120.65,42.814 ; R35.1@115.788,39.544 cw(c116.596,38.736) 116.596,39.878 cw(c116.596,41.02) R35.1@115.788,40.212
NetJ5_3: J5.3 R36.1 R37.1 | length 16.4
  Bottom Layer w0.254: R37.1@114.601,36.032 ccw(c113.793,36.84) 114.935,36.84 ccw(c116.077,36.84) R37.1@115.269,36.032 ; R36.1@114.739,37.412 cw(c114.264,36.937) 114.935,36.937 ; R37.1@114.935,35.698 R36.1@114.935,37.708 ; R37.1@114.935,36.271 cw(c116.548,36.271) R36.1@115.407,37.412 ; 114.935,36.884 cw(c115.935,36.884) R36.1@115.228,37.591 ; R36.1@115.073,37.846 116.84,37.846 117.96,38.966 117.96,40.363 119.761,42.164 J5.3@120.65,42.164 ; R36.1@115.407,37.512 cw(c116.215,36.704) 116.215,37.846 cw(c116.215,38.988) R36.1@115.407,38.18
NetLED1_1: LED1.1 R15.2 | length 12.9
  Top Layer w0.25: v1(62.357,39.243) 62.379,39.265 R15.2@64.008,39.265 ; v1(62.357,41.783) 63.997,41.783 LED1.1@64.008,41.772 ; v1@62.516,39.084 cw(c62.953,38.647) 62.953,39.265 ; v1@62.516,39.402 ccw(c62.847,39.733) 62.847,39.265 ; v1@62.516,41.624 cw(c62.9,41.24) 62.9,41.783 cw(c62.9,42.326) v1@62.516,41.942 ; 62.735,41.783 cw(c62.735,40.599) LED1.1@63.572,41.436 ; 62.788,41.783 ccw(c62.788,42.892) LED1.1@63.572,42.108 ; R15.2@63.572,38.929 ccw(c62.761,38.118) 62.761,39.265 ccw(c62.761,40.412) R15.2@63.572,39.601
  Bottom Layer w0.25: v1@62.198,39.402 ccw(c61.814,39.786) 62.357,39.786 ccw(c62.9,39.786) v1@62.516,39.402 ; v1@62.198,41.624 cw(c61.814,41.24) 62.357,41.24 cw(c62.9,41.24) v1@62.516,41.624 ; v1(62.357,39.243) v1(62.357,41.783)
NetLED2_1: LED2.1 R17.2 | length 13.1
  Top Layer w0.25: R17.2@66.675,39.381 66.813,39.243 v1(68.199,39.243) cw(c68.199,40.728) R17.2@67.12,39.707 ; LED2.1@66.802,41.645 68.188,41.645 v1(68.199,41.656) ; R17.2@66.938,39.536 ccw(c67.618,40.179) 67.618,39.243 ; R17.2@67.111,39.045 cw(c67.589,38.567) 67.589,39.243 ; LED2.1@67.238,41.309 cw(c68.049,40.498) 68.049,41.645 cw(c68.049,42.792) LED2.1@67.238,41.981 ; 67.629,41.645 ccw(c67.629,42.226) v1@68.04,41.815 ; 67.682,41.645 cw(c67.682,41.139) v1@68.04,41.497 ; v1@68.04,39.084 ccw(c67.656,38.7) 67.656,39.243 ccw(c67.656,39.786) v1@68.04,39.402
  Bottom Layer w0.25: v1@68.04,39.402 ccw(c67.656,39.786) 68.199,39.786 ccw(c68.742,39.786) v1@68.358,39.402 ; v1@68.04,41.497 cw(c67.656,41.113) 68.199,41.113 cw(c68.742,41.113) v1@68.358,41.497 ; v1(68.199,39.243) v1(68.199,41.656)
NetLED3_1: LED3.1 R21.2 | length 9.5
  Top Layer w0.254: v1(114.427,24.003) 114.438,23.992 LED3.1@117.221,23.992 ; v1@114.585,23.845 cw(c114.939,23.491) 114.939,23.992 ; v1@114.585,24.161 ccw(c114.992,24.568) 114.992,23.992 ; LED3.1@116.787,23.658 ccw(c115.979,22.85) 115.979,23.992 ccw(c115.979,25.134) LED3.1@116.787,24.326
  Bottom Layer w0.254: R21.2@114.093,25.055 cw(c113.285,24.247) 114.427,24.247 cw(c115.569,24.247) R21.2@114.761,25.055 ; v1@114.269,24.161 ccw(c113.889,24.541) 114.427,24.541 ccw(c114.965,24.541) v1@114.585,24.161 ; v1(114.427,24.003) R21.2@114.427,25.389
NetLED5_2: LED5.2 R40.2 | length 14
  Top Layer w0.254: R40.2@82.434,38.735 v1(83.947,38.735) ; R40.2@82.768,38.401 cw(c83.576,37.593) 83.576,38.735 cw(c83.576,39.877) R40.2@82.768,39.069 ; v1@83.789,38.577 ccw(c83.409,38.197) 83.409,38.735 ccw(c83.409,39.273) v1@83.789,38.893 ; LED5.2@84.759,40.837 cw(c84.603,40.513) 84.963,40.513 ; LED5.2@84.963,41.264 84.963,40.513 ; LED5.2@85.167,40.837 ccw(c85.323,40.513) 84.963,40.513 ; 85.71,39.766 cw(c84.679,38.735) v1@86.137,38.735 ; 86.144,39.332 cw(c85.546,38.735) v1@86.391,38.735 ; v1(86.36,38.735) 86.36,39.116 84.963,40.513
  Bottom Layer w0.254: v1(83.947,38.735) v1(86.36,38.735) ; v1@84.105,38.577 cw(c84.485,38.197) 84.485,38.735 cw(c84.485,39.273) v1@84.105,38.893 ; v1@86.202,38.577 ccw(c85.822,38.197) 85.822,38.735 ccw(c85.822,39.273) v1@86.202,38.893
NetLED6_2: LED6.2 R38.1 | length 7.7
  Top Layer w0.254: R38.1@85.344,45.328 85.355,45.339 86.741,45.339 87.757,44.323 LED6.2@87.757,43.064 ; R38.1@85.778,44.994 cw(c86.612,44.16) 86.612,45.339 ; R38.1@85.778,45.662 ccw(c86.559,46.443) 86.559,45.339 ; LED6.2@87.423,43.398 ccw(c86.615,44.206) 87.757,44.206 ccw(c88.899,44.206) LED6.2@88.091,43.398
NetLED7_1: LED7.1 P24.1 | length 8.3
  Top Layer w0.25: P24.1@33.782,35.179 35.052,35.179 ; P24.1@34.079,34.95 cw(c34.544,34.592) 34.544,35.179 cw(c34.544,35.766) P24.1@34.079,35.408 ; P24.1@34.277,34.798 cw(c35.052,34.201) 35.052,35.179 ; P24.1@34.277,35.56 ccw(c35.052,36.157) 35.052,35.179 ; LED7.1@36.699,33.769 ccw(c36.195,33.427) 36.195,34.036 ; LED7.1@36.699,34.303 cw(c36.195,34.645) 36.195,34.036 ; LED7.1@37.592,34.036 36.195,34.036 ; 35.052,35.179 36.195,34.036
NetLED7_2: LED7.2 P24.2 | length 10.1
  Top Layer w0.25: P24.2@33.782,32.639 35.306,32.639 35.814,32.131 ; P24.2@34.047,32.374 cw(c34.687,31.734) 34.687,32.639 cw(c34.687,33.544) P24.2@34.047,32.904 ; P24.2@34.224,32.197 cw(c35.291,31.13) 35.291,32.639 cw(c35.291,34.148) P24.2@34.224,33.081 ; 36.252,32.131 cw(c36.252,31.418) LED7.2@36.756,31.922 ; 36.345,32.131 ccw(c36.345,32.875) LED7.2@36.919,32.401 ; LED7.2@36.726,32.56 cw(c35.814,33.313) 35.814,32.131 ; LED7.2@37.592,32.258 37.465,32.131 35.814,32.131
NetLED7_3: LED7.3 P24.3 | length 8.1
  Top Layer w0.25: P24.3@33.782,30.099 34.036,29.845 35.052,29.845 ; P24.3@34.133,30.231 ccw(c34.691,30.441) 34.691,29.845 ; P24.3@34.224,29.657 cw(c34.678,29.203) 34.678,29.845 ; P24.3@34.367,30.319 ccw(c35.052,30.577) 35.052,29.845 ; LED7.3@36.756,30.144 ccw(c35.945,29.333) 35.945,30.48 ccw(c35.945,31.627) LED7.3@36.756,30.816 ; LED7.3@37.592,30.48 35.687,30.48 35.052,29.845
NetLED7_4: LED7.4 R50.2 | length 5.9
  Top Layer w0.25: LED7.4@42.284,34.492 ccw(c42.231,34.671) 42.418,34.671 ; LED7.4@42.418,34.036 42.418,34.671 ; LED7.4@42.552,34.492 cw(c42.605,34.671) 42.418,34.671 ; R50.2@44.865,34.843 ccw(c44.054,34.032) 44.054,35.179 ccw(c44.054,36.326) R50.2@44.865,35.515 ; R50.2@45.201,35.179 42.926,35.179 42.418,34.671
NetLED7_5: LED7.5 R51.2 | length 7.3
  Top Layer w0.25: LED7.5@42.418,32.258 44.947,32.258 R51.2@45.201,32.512 ; LED7.5@43.254,31.922 cw(c44.065,31.111) 44.065,32.258 cw(c44.065,33.405) LED7.5@43.254,32.594 ; 43.682,32.258 ccw(c43.682,33.931) R51.2@44.865,32.748 ; 44.286,32.258 ccw(c44.286,33.327) R51.2@45.042,32.571 ; 44.426,32.258 cw(c44.426,31.637) R51.2@44.865,32.076
NetLED7_6: LED7.6 R52.2 | length 7
  Top Layer w0.25: LED7.6@42.418,30.48 44.831,30.48 45.201,30.11 R52.2@45.201,29.464 ; LED7.6@43.254,30.144 cw(c44.065,29.333) 44.065,30.48 cw(c44.065,31.627) LED7.6@43.254,30.816 ; 44.824,30.487 cw(c44.278,29.941) R52.2@44.993,29.649 ; 45.09,30.221 cw(c44.656,29.787) R52.2@45.224,29.555
NetP2_1: P2.1 R2.1 U2.7 | length 24.2
  Top Layer w0.25: P2.1@28.956,108.839 29.972,108.839 ; P2.1@29.514,108.557 cw(c29.972,108.326) 29.972,108.839 ; P2.1@29.514,109.121 ccw(c29.972,109.352) 29.972,108.839 ; U2.7@34.639,115.142 ccw(c34.255,115.526) 34.798,115.526 ccw(c35.341,115.526) U2.7@34.957,115.142 ; U2.7@34.798,114.083 34.798,115.676 34.417,116.057 34.408,116.047 32.481,116.047 30.353,113.919 30.353,109.22 29.972,108.839
  Bottom Layer w0.25: P2.1@28.956,108.839 30.353,108.839 ; P2.1@29.236,108.589 cw(c29.794,108.09) 29.794,108.839 cw(c29.794,109.588) P2.1@29.236,109.089 ; P2.1@29.422,108.422 cw(c30.353,107.59) 30.353,108.839 ; P2.1@29.422,109.256 ccw(c30.353,110.088) 30.353,108.839 ; R2.1@30.779,110.524 cw(c29.968,109.713) 31.115,109.713 cw(c32.262,109.713) R2.1@31.451,110.524 ; R2.1@31.115,110.86 31.115,109.601 30.353,108.839
NetP2_2: P2.2 R2.2 U2.6 | length 23.1
  Top Layer w0.25: P2.2@28.514,111.821 ccw(c27.447,112.888) 28.956,112.888 ccw(c30.465,112.888) P2.2@29.398,111.821 ; P2.2@28.691,111.644 ccw(c28.051,112.284) 28.956,112.284 ccw(c29.861,112.284) P2.2@29.221,111.644 ; P2.2@28.956,111.379 28.956,113.284 32.131,116.459 35.179,116.459 36.068,115.57 U2.6@36.068,114.083 ; U2.6@35.909,115.142 ccw(c35.525,115.526) 36.068,115.526 ccw(c36.611,115.526) U2.6@36.227,115.142
  Bottom Layer w0.25: P2.2@28.674,111.937 ccw(c28.443,112.395) 28.956,112.395 ; P2.2@28.956,111.379 28.956,112.395 ; P2.2@29.238,111.937 cw(c29.469,112.395) 28.956,112.395 ; R2.2@30.679,112.324 ccw(c29.868,111.513) 29.868,112.66 ccw(c29.868,113.807) R2.2@30.679,112.996 ; R2.2@31.115,112.66 29.221,112.66 28.956,112.395
NetP13_2: P13.2 U4.16 | length 11.6
  Top Layer w0.25: P13.2@43.688,105.029 46.228,105.029 48.071,106.872 ; P13.2@43.953,104.764 cw(c44.593,104.124) 44.593,105.029 cw(c44.593,105.934) P13.2@43.953,105.294 ; P13.2@44.13,104.587 cw(c45.197,103.52) 45.197,105.029 cw(c45.197,106.538) P13.2@44.13,105.471 ; U4.16@48.617,106.625 ccw(c48.071,106.146) 48.071,106.872 ; U4.16@48.617,107.119 cw(c48.071,107.598) 48.071,106.872 ; U4.16@49.524,106.872 48.071,106.872
NetP13_3: P13.3 U4.17 | length 11.6
  Top Layer w0.25: P13.3@43.688,107.569 46.482,107.569 47.785,108.872 U4.17@49.524,108.872 ; P13.3@43.953,107.304 cw(c44.593,106.664) 44.593,107.569 cw(c44.593,108.474) P13.3@43.953,107.834 ; P13.3@44.13,107.127 cw(c45.197,106.06) 45.197,107.569 cw(c45.197,109.078) P13.3@44.13,108.011 ; U4.17@48.634,108.607 ccw(c47.994,107.967) 47.994,108.872 ccw(c47.994,109.777) U4.17@48.634,109.137
NetP13_4: P13.4 U4.18 | length 11.4
  Top Layer w0.25: P13.4@43.688,110.109 46.482,110.109 47.245,110.872 U4.18@49.524,110.872 ; P13.4@43.953,109.844 cw(c44.593,109.204) 44.593,110.109 cw(c44.593,111.014) P13.4@43.953,110.374 ; P13.4@44.13,109.667 cw(c45.197,108.6) 45.197,110.109 cw(c45.197,111.618) P13.4@44.13,110.551 ; U4.18@48.634,110.607 ccw(c47.994,109.967) 47.994,110.872 ccw(c47.994,111.777) U4.18@48.634,111.137
NetP13_5: P13.5 U4.19 | length 11.1
  Top Layer w0.25: P13.5@43.688,112.649 46.609,112.649 46.832,112.872 U4.19@49.524,112.872 ; P13.5@43.953,112.384 cw(c44.593,111.744) 44.593,112.649 cw(c44.593,113.554) P13.5@43.953,112.914 ; P13.5@44.13,112.207 cw(c45.197,111.14) 45.197,112.649 cw(c45.197,114.158) P13.5@44.13,113.091 ; U4.19@48.634,112.607 ccw(c47.994,111.967) 47.994,112.872 ccw(c47.994,113.777) U4.19@48.634,113.137
NetP13_6: P13.6 R11.2 U4.20 | length 22.6
  Top Layer w0.25: P13.6@43.688,115.189 46.609,115.189 46.926,114.872 U4.20@49.524,114.872 52.006,114.872 v1(52.07,114.808) ; P13.6@43.953,114.924 cw(c44.593,114.284) 44.593,115.189 cw(c44.593,116.094) P13.6@43.953,115.454 ; P13.6@44.13,114.747 cw(c45.197,113.68) 45.197,115.189 cw(c45.197,116.698) P13.6@44.13,115.631 ; U4.20@48.634,114.607 ccw(c47.994,113.967) 47.994,114.872 ccw(c47.994,115.777) U4.20@48.634,115.137 ; U4.20@50.414,114.607 cw(c51.054,113.967) 51.054,114.872 cw(c51.054,115.777) U4.20@50.414,115.137 ; 51.372,114.872 cw(c51.372,114.11) v1@51.911,114.649 ; 51.681,114.872 ccw(c51.681,115.197) v1@51.911,114.967
  Bottom Layer w0.25: v1@51.911,114.649 cw(c51.527,114.265) 52.07,114.265 cw(c52.613,114.265) v1@52.229,114.649 ; v1(52.07,114.808) 52.07,113.919 52.567,113.422 R11.2@54.864,113.422 ; R11.2@54.428,113.086 ccw(c53.617,112.275) 53.617,113.422 ccw(c53.617,114.569) R11.2@54.428,113.758
NetP13_7: P13.7 U4.21 | length 11.4
  Top Layer w0.25: P13.7@43.688,117.729 46.863,117.729 47.72,116.872 U4.21@49.524,116.872 ; P13.7@43.953,117.464 cw(c44.593,116.824) 44.593,117.729 cw(c44.593,118.634) P13.7@43.953,117.994 ; P13.7@44.13,117.287 cw(c45.197,116.22) 45.197,117.729 cw(c45.197,119.238) P13.7@44.13,118.171 ; U4.21@48.634,116.607 ccw(c47.994,115.967) 47.994,116.872 ccw(c47.994,117.777) U4.21@48.634,117.137
NetP13_8: P13.8 U4.22 | length 11.6
  Top Layer w0.25: P13.8@43.688,120.269 46.228,120.269 47.625,118.872 U4.22@49.524,118.872 ; P13.8@43.953,120.004 cw(c44.593,119.364) 44.593,120.269 cw(c44.593,121.174) P13.8@43.953,120.534 ; P13.8@44.13,119.827 cw(c45.197,118.76) 45.197,120.269 cw(c45.197,121.778) P13.8@44.13,120.711 ; U4.22@48.634,118.607 ccw(c47.994,117.967) 47.994,118.872 ccw(c47.994,119.777) U4.22@48.634,119.137
NetP14_3: P14.3 U4.3 | length 10.6
  Top Layer w0.25: U4.3@64.774,114.872 67.247,114.872 67.691,115.316 P14.3@69.977,115.316 ; U4.3@65.664,114.607 cw(c66.304,113.967) 66.304,114.872 cw(c66.304,115.777) U4.3@65.664,115.137 ; P14.3@69.535,114.874 ccw(c68.468,113.807) 68.468,115.316 ccw(c68.468,116.825) P14.3@69.535,115.758 ; P14.3@69.712,115.051 ccw(c69.072,114.411) 69.072,115.316 ccw(c69.072,116.221) P14.3@69.712,115.581
NetP14_4: P14.4 U4.4 | length 9.9
  Top Layer w0.25: U4.4@64.774,112.872 P14.4@69.881,112.872 ; U4.4@65.664,112.607 cw(c66.304,111.967) 66.304,112.872 cw(c66.304,113.777) U4.4@65.664,113.137 ; 68.236,112.872 cw(c68.236,111.035) P14.4@69.535,112.334 ; 68.7,112.872 ccw(c68.7,114.053) P14.4@69.535,113.218 ; 68.84,112.872 cw(c68.84,111.639) P14.4@69.712,112.511
NetP14_5: P14.5 U4.5 | length 10.7
  Top Layer w0.25: U4.5@64.774,110.872 67.055,110.872 67.691,110.236 P14.5@69.977,110.236 ; U4.5@65.664,110.607 cw(c66.304,109.967) 66.304,110.872 cw(c66.304,111.777) U4.5@65.664,111.137 ; P14.5@69.535,109.794 ccw(c68.468,108.727) 68.468,110.236 ccw(c68.468,111.745) P14.5@69.535,110.678 ; P14.5@69.712,109.971 ccw(c69.072,109.331) 69.072,110.236 ccw(c69.072,111.141) P14.5@69.712,110.501
NetP14_6: P14.6 U4.6 | length 10.9
  Top Layer w0.25: U4.6@64.774,108.872 66.896,108.872 68.072,107.696 P14.6@69.977,107.696 ; U4.6@65.664,108.607 cw(c66.304,107.967) 66.304,108.872 cw(c66.304,109.777) U4.6@65.664,109.137 ; P14.6@69.535,107.254 ccw(c68.468,106.187) 68.468,107.696 ccw(c68.468,109.205) P14.6@69.535,108.138 ; P14.6@69.712,107.431 ccw(c69.072,106.791) 69.072,107.696 ccw(c69.072,108.601) P14.6@69.712,107.961
NetP14_7: P14.7 R14.2 U4.7 | length 19.6
  Top Layer w0.25: v1(62.346,106.818) U4.7@64.72,106.818 ; v1@62.505,106.659 cw(c62.889,106.275) 62.889,106.818 cw(c62.889,107.361) v1@62.505,106.977 ; 63.113,106.818 ccw(c63.113,107.908) U4.7@63.884,107.137 ; 63.374,106.818 cw(c63.374,106.097) U4.7@63.884,106.607 ; U4.7@64.774,106.872 66.991,106.872 68.707,105.156 ; U4.7@65.664,106.607 cw(c66.304,105.967) 66.304,106.872 cw(c66.304,107.777) U4.7@65.664,107.137 ; P14.7@69.482,104.775 ccw(c68.707,104.178) 68.707,105.156 ; P14.7@69.482,105.537 cw(c68.707,106.134) 68.707,105.156 ; P14.7@69.68,104.927 ccw(c69.215,104.569) 69.215,105.156 ccw(c69.215,105.743) P14.7@69.68,105.385 ; P14.7@69.977,105.156 68.707,105.156
  Bottom Layer w0.25: R14.2@60.198,106.818 v1(62.346,106.818) ; R14.2@60.634,106.482 cw(c61.445,105.671) 61.445,106.818 cw(c61.445,107.965) R14.2@60.634,107.154 ; v1@62.187,106.659 ccw(c61.803,106.275) 61.803,106.818 ccw(c61.803,107.361) v1@62.187,106.977
NetP15_3: P15.3 R12.2 | length 11.3
  Bottom Layer w0.254: P15.3@29.972,75.057 31.483,76.568 32.938,76.568 33.333,76.962 R12.2@34.914,76.962 ; P15.3@29.972,75.426 ccw(c29.972,76.317) 30.602,75.687 ccw(c31.232,75.057) P15.3@30.341,75.057 ; P15.3@29.972,75.68 ccw(c29.972,77.184) 31.036,76.12 ccw(c32.099,75.057) P15.3@30.595,75.057 ; R12.2@34.58,76.628 ccw(c33.772,75.82) 33.772,76.962 ccw(c33.772,78.104) R12.2@34.58,77.296
NetP15_4: P15.4 R13.1 | length 9.2
  Bottom Layer w0.254: P15.4@32.512,75.057 33.782,75.057 ; P15.4@32.804,74.831 cw(c33.264,74.475) 33.264,75.057 cw(c33.264,75.639) P15.4@32.804,75.283 ; P15.4@33.005,74.676 cw(c33.782,74.074) 33.782,75.057 ; P15.4@33.005,75.438 ccw(c33.782,76.04) 33.782,75.057 ; R13.1@34.707,72.697 ccw(c33.899,73.505) 35.041,73.505 ccw(c36.183,73.505) R13.1@35.375,72.697 ; R13.1@35.041,72.263 35.041,73.798 33.782,75.057
NetP16_1: P16.1 U4.9 | length 8.4
  Top Layer w0.25: P16.1@58.519,99.618 ccw(c58.288,100.076) 58.801,100.076 ; P16.1@58.801,99.06 58.801,100.076 ; P16.1@59.083,99.618 cw(c59.314,100.076) 58.801,100.076 ; U4.9@61.936,102.813 cw(c61.657,102.408) 62.149,102.408 ; U4.9@62.149,103.372 62.149,102.408 ; U4.9@62.362,102.813 ccw(c62.641,102.408) 62.149,102.408 ; 58.801,100.076 59.309,100.584 60.325,100.584 62.149,102.408
NetP16_2: P16.2 U4.10 | length 9.2
  Top Layer w0.25: P16.2@56.049,99.648 ccw(c55.941,99.949) 56.261,99.949 ; P16.2@56.261,99.06 56.261,99.949 ; P16.2@56.473,99.648 cw(c56.581,99.949) 56.261,99.949 ; U4.10@59.884,102.857 cw(c59.244,102.217) 60.149,102.217 cw(c61.054,102.217) U4.10@60.414,102.857 ; U4.10@60.149,103.372 60.149,102.059 58.356,100.266 56.578,100.266 56.261,99.949
NetP16_3: P16.3 U4.11 | length 9.7
  Top Layer w0.25: P16.3@53.439,99.618 ccw(c53.208,100.076) 53.721,100.076 ; P16.3@53.721,99.06 53.721,100.076 ; P16.3@54.003,99.618 cw(c54.234,100.076) 53.721,100.076 ; U4.11@57.916,102.828 cw(c57.532,102.345) 58.149,102.345 ; U4.11@58.149,103.372 58.149,102.345 ; U4.11@58.382,102.828 ccw(c58.766,102.345) 58.149,102.345 ; 53.721,100.076 54.313,100.668 56.472,100.668 58.149,102.345
NetP16_4: P16.4 U4.12 | length 12.5
  Top Layer w0.25: P16.4@50.8,99.555 ccw(c50.203,100.33) 51.181,100.33 ; P16.4@50.952,99.357 ccw(c50.594,99.822) 51.181,99.822 ccw(c51.768,99.822) P16.4@51.41,99.357 ; P16.4@51.181,99.06 51.181,100.33 ; P16.4@51.562,99.555 cw(c52.159,100.33) 51.181,100.33 ; U4.12@55.884,102.857 cw(c55.244,102.217) 56.149,102.217 cw(c57.054,102.217) U4.12@56.414,102.857 ; U4.12@56.149,103.372 56.149,102.123 55.097,101.071 51.922,101.071 51.181,100.33
NetP16_5: P16.5 U4.13 | length 13.4
  Top Layer w0.25: P16.5@48.224,99.526 ccw(c47.392,100.457) 48.641,100.457 ; P16.5@48.391,99.34 ccw(c47.892,99.898) 48.641,99.898 ccw(c49.39,99.898) P16.5@48.891,99.34 ; P16.5@48.641,99.06 48.641,100.457 ; P16.5@49.058,99.526 cw(c49.89,100.457) 48.641,100.457 ; U4.13@53.899,102.843 cw(c53.396,102.282) 54.149,102.282 ; U4.13@54.149,103.372 54.149,102.282 ; U4.13@54.399,102.843 ccw(c54.902,102.282) 54.149,102.282 ; 48.641,100.457 49.657,101.473 53.34,101.473 54.149,102.282
NetP16_6: P16.6 U4.14 | length 14
  Top Layer w0.25: P16.6@45.659,99.502 ccw(c44.592,100.569) 46.101,100.569 ccw(c47.61,100.569) P16.6@46.543,99.502 ; P16.6@45.836,99.325 ccw(c45.196,99.965) 46.101,99.965 ccw(c47.006,99.965) P16.6@46.366,99.325 ; P16.6@46.101,99.06 46.101,100.711 48.762,103.372 U4.14@52.149,103.372 ; U4.14@51.884,103.107 ccw(c51.244,102.467) 51.244,103.372 ccw(c51.244,104.277) U4.14@51.884,103.637